# Altium PCB AD Sensor Module.PcbDoc
Units mil, origin at the board's own origin, x right, y up, seen from the top; angles counter-clockwise.
Board outline 3000 x 1100 mil, 4 copper layers (Top Layer, Ground Plane, Power Plane, Bottom Layer), stack 30.634 mil thick; 79 components, 66 nets, 287 pads, 94 vias.
Unrouted connection lines stored in the file: 1.
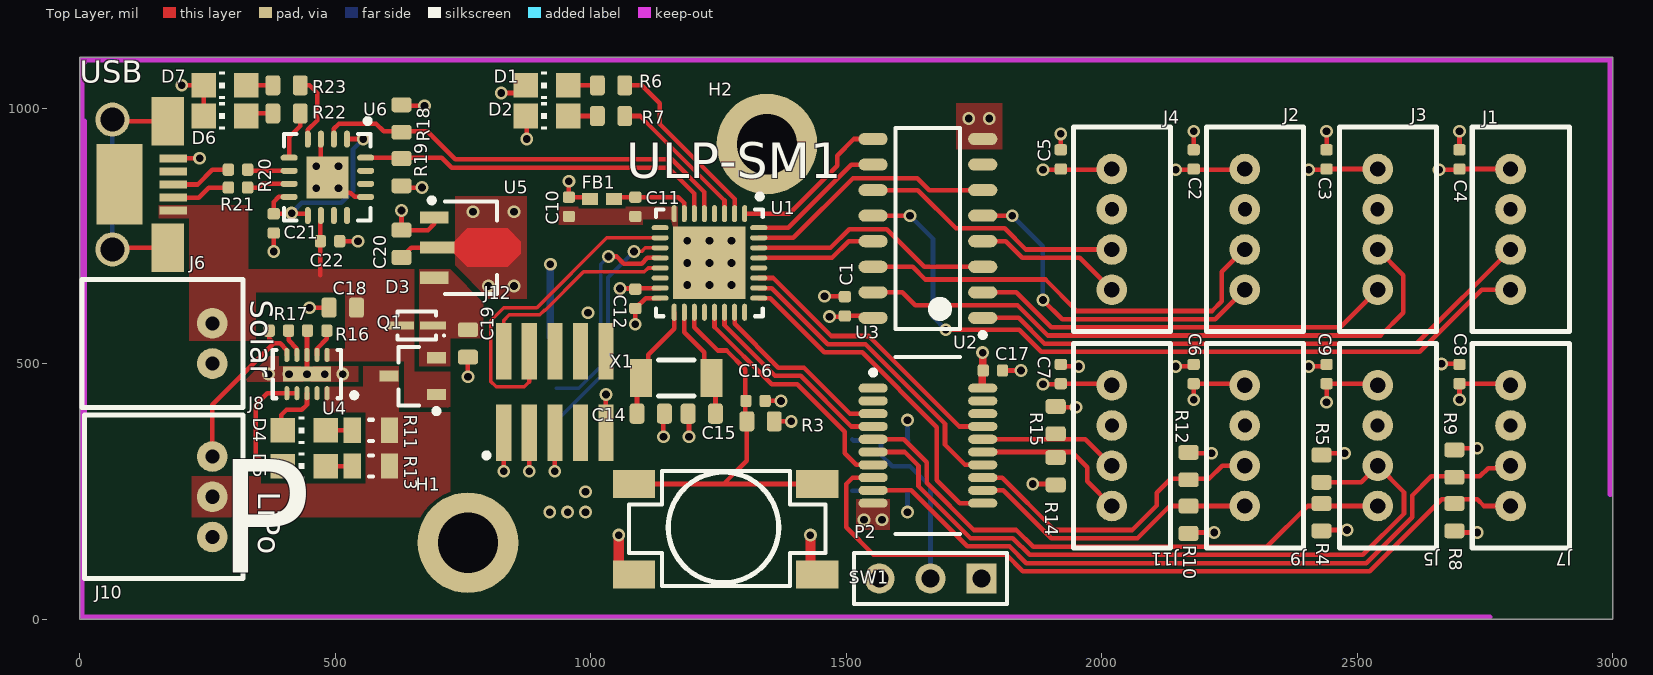
[diagram p0: Top Layer view]
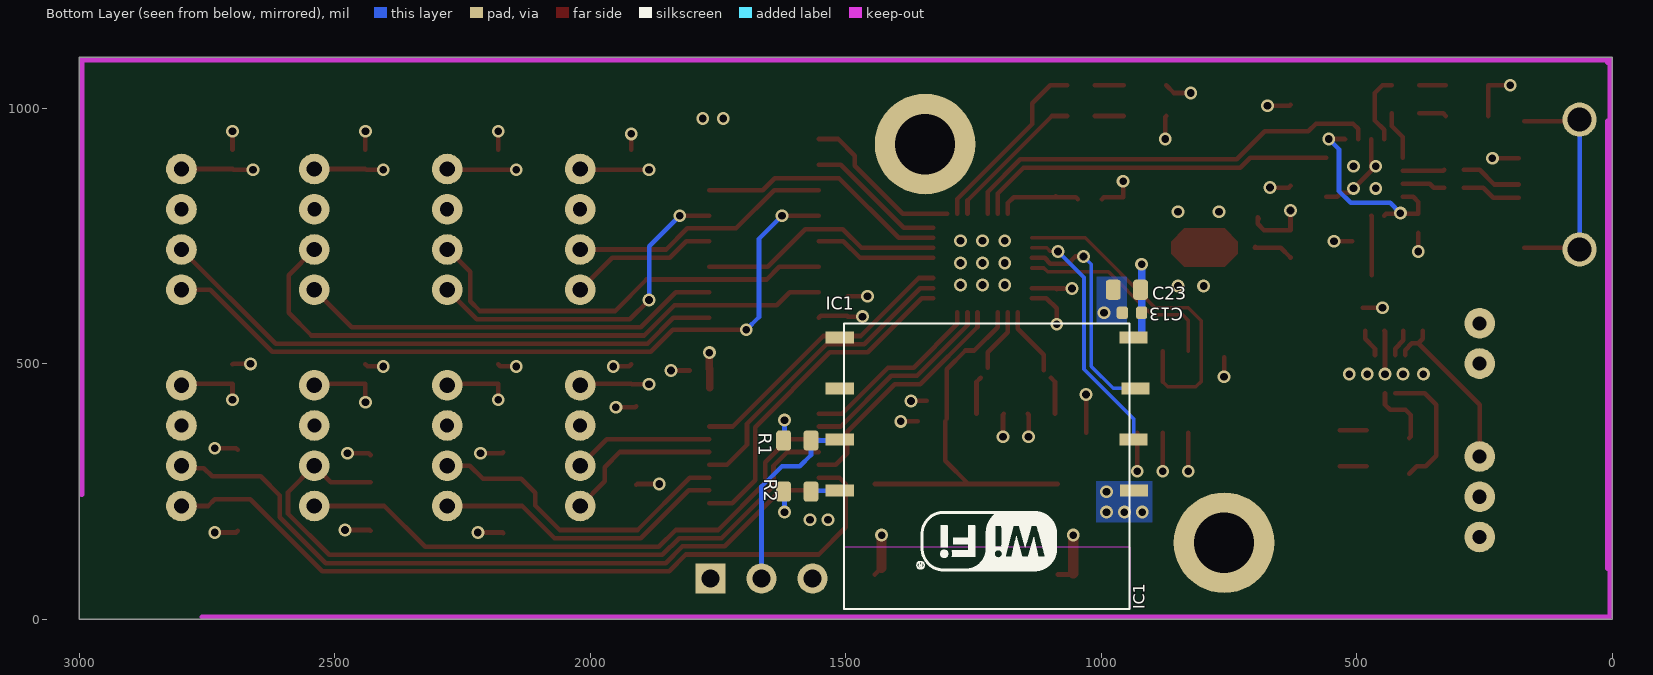
[diagram p1: Bottom Layer view, seen from below]
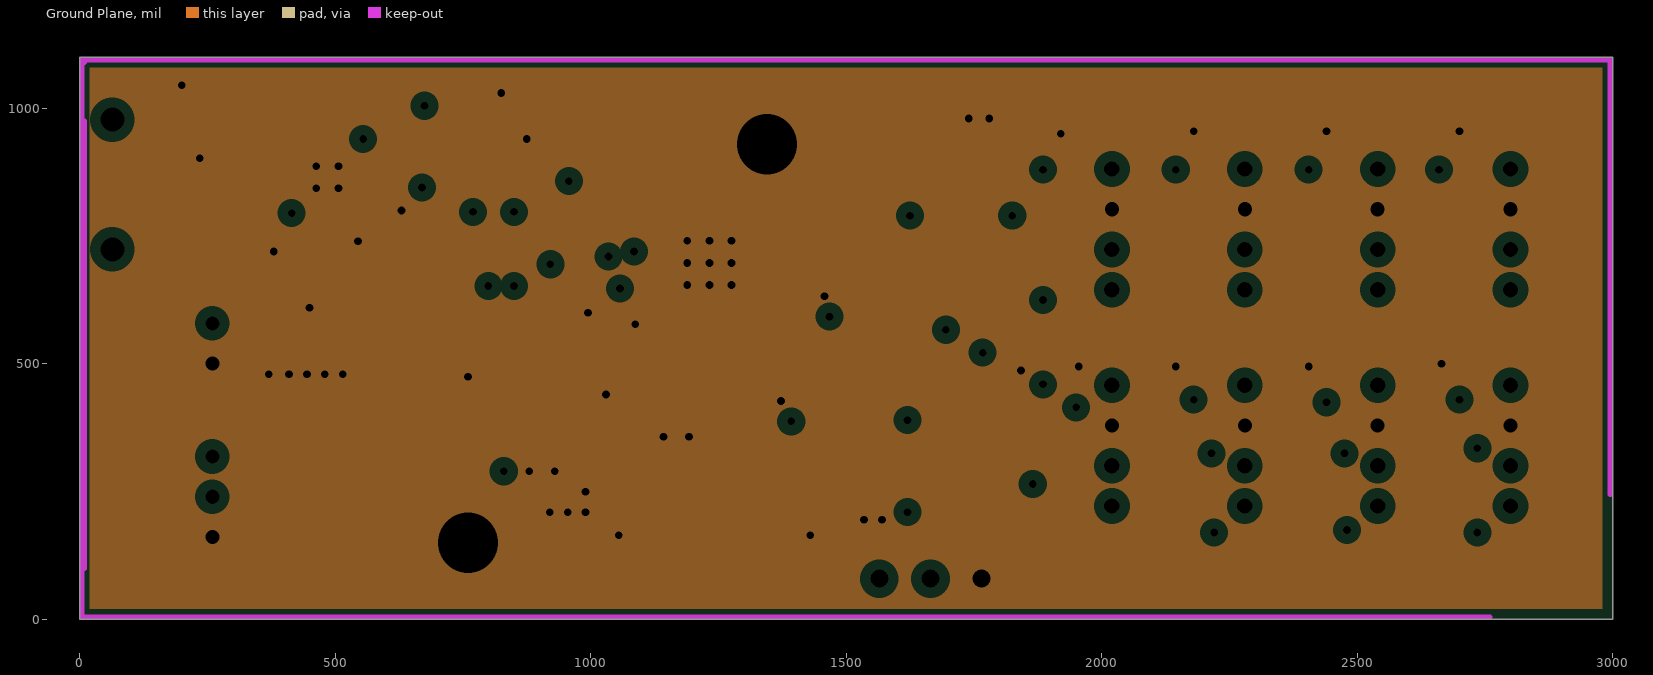
[diagram p2: Ground Plane, clearances drawn from the general rule]
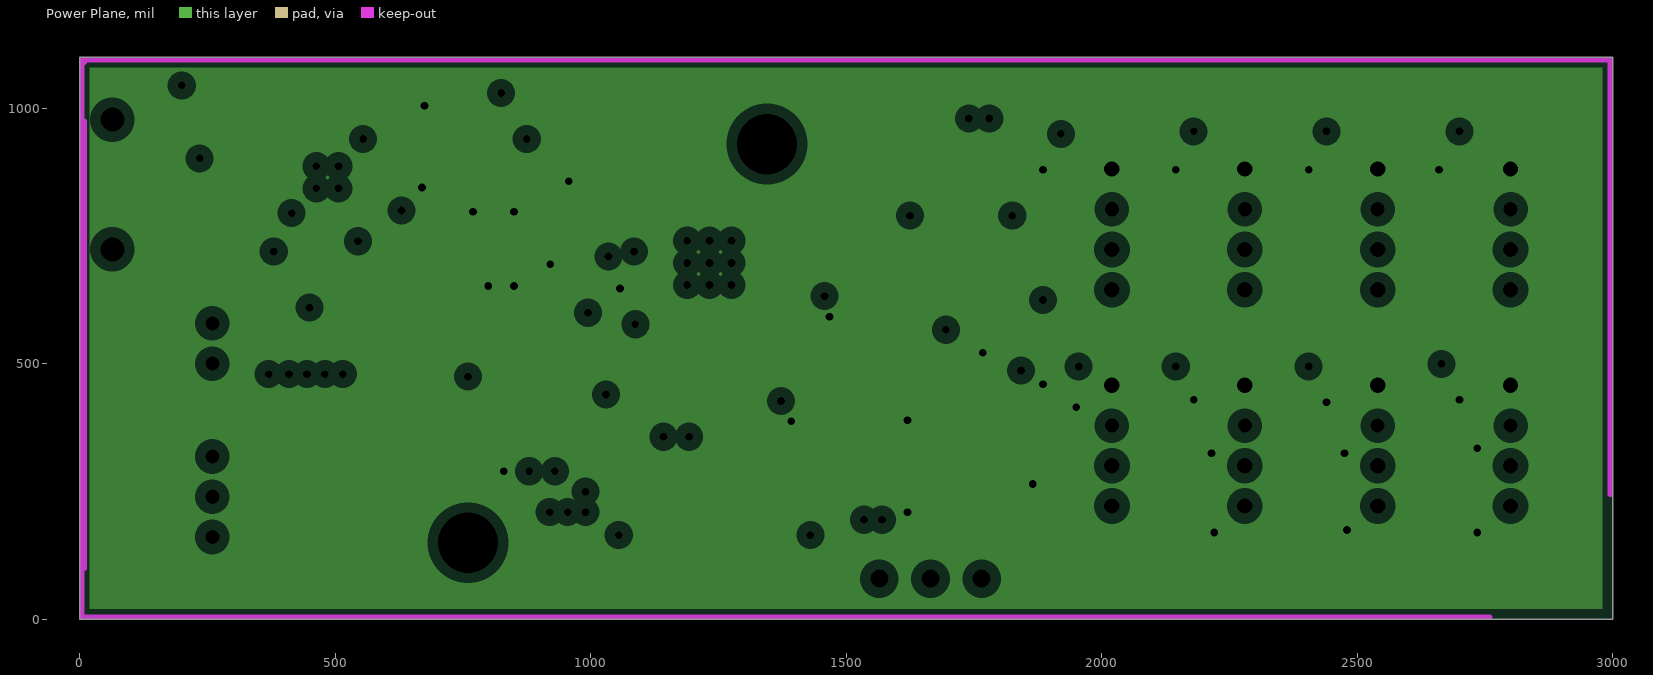
[diagram p3: Power Plane, clearances drawn from the general rule]

## Layer stack, top to bottom
Top Solder: solder mask 0.4, Solder Resist, Dk 3.5
Top Layer: signal copper 1.4
Dielectric 1: core 10, FR-4, Dk 4.2
Ground Plane: plane copper 1.417, net GND
Dielectric 2: core 10, Dk 4.2
Power Plane: plane copper 1.417, net 3.3VCC
Dielectric 3: prepreg 5, Dk 4.2
Bottom Layer: signal copper 1.4
Bottom Solder: solder mask 0.4, Solder Resist, Dk 3.5

## Board outline
0,0 3000,0 3000,1100 0,1100

## Design rules (kind name [scope] priority, off if disabled: settings)
AcuteAngle [All] p1: minimum=6.00000000000000E+0001 checktracksonly=FALSE
Clearance [All] p1: gap=7
ComponentClearance [All] p1: gap=7 collisioncheckmode=3 verticalgap=10 showdistances=TRUE
FanoutControl Fanout_SOIC [(InComponent('U8') AND InComponent('U7'))] p3: bgadir=Out bgaviamode=Centered fanoutstyle=Staggered fanoutdirection=Alternating viagrid=1 // Fanout_SOIC (Default Rule)
FanoutControl Fanout_Small [All] p4: bgadir=Out bgaviamode=Centered fanoutstyle=Auto fanoutdirection=Alternating viagrid=1 // Fanout_Small (Default Rule)
HoleSize [All] p1: absolutevalues=TRUE maxlimit=200 minlimit=15 maxpercent=80.000 minpercent=20.000
MinimumSolderMaskSliver [All] p1 off: minsoldermaskwidth=10
PasteMaskExpansion [All] p1: expansion=-1
PlaneClearance [All] p1: clearance=20
PlaneConnect [All] p1: planeconnectstyle=Relief reliefexpansion=20 reliefentries=4 reliefconductorwidth=10 reliefairgap=10
PolygonConnect [All] p1: connectstyle=Direct reliefconductorwidth=10 reliefentries=4 polygonreliefangle="90 Angle" airgapwidth=10
RoutingVias [All] p1: holewidth=15 width=25 viastyle="Through Hole" minholewidth=15 minwidth=25 maxholewidth=28 maxwidth=50
SMDToCorner [All] p1: distance=30000
SilkToSilkClearance [All] p1 off: silktosilkclearance=10
SilkToSolderMaskClearance SilkscreenOverComponentPads [IsPad] p1 off: minsilkscreentomaskgap=10 clearancetoexposedcopper=TRUE
SolderMaskExpansion [All] p1: expansion=4
Width [All] p1: maxlimit=200 minlimit=7 preferedwidth=8 minimp=50.000000 maximp=50.000000 favimp=50.000000
20 further rules are at their usual default settings.

## Components (designator, comment, footprint, x,y, rotation, side; value= is the part's Value field where it differs from the comment)
C1 "100nF" C0402 1497.5,612.5 r90 top
C2 "100nF" C0402 2180,900 r90 top
C3 "100nF" C0402 2440,900 r90 top
C4 "100nF" C0402 2700,900 r90 top
C5 "100nF" C0402 1920,900 r90 top
C6 "100nF" C0402 2180,480 r90 top
C7 "100nF" C0402 1920,480 r90 top
C8 "100nF" C0402 2700,480 r90 top
C9 "100nF" C0402 2440,480 r90 top
C10 "100nF" C0402 957.5,807.5 r270 top
C11 "100nF" C0402 1087.5,807.5 r270 top
C12 "100nF" C0402 1087.5,627.5 r270 top
C13 "100nF" C0402 940,600 r0 bottom
C14 "0603" C0603 1117.5,402.5 r180 top
C15 "0603" C0603 1217.5,402.5 r0 top
C16 "100nF" C0402 1322.5,427.5 r0 top
C17 "100nF" C0402 1787,487 r0 top
C18 "0603" C0603 515,610 r0 top
C19 "0603" C0603 760,540 r90 top
C20 "0603" C0603 630,735 r270 top
C21 "100nF" C0402 380,775 r270 top
C22 "100nF" C0402 490,740 r0 top
C23 "0603" C0603 950,645 r180 bottom
D1 "5988140107F" LED2012120 915,1045 r180 top
D2 "5988140107F" LED2012120 915,985 r180 top
D3 "BAT20JFILM" "BAT20JFILM - DIOM1712X11N" 660,575 r180 top
D4 "5988140107F" LED2012120 440,369.99 r180 top
D5 "5988140107F" LED2012120 440,299.99 r180 top
D6 "5988140107F" LED2012120 285,985 r180 top
D7 "5988140107F" LED2012120 285,1045 r180 top
FB1 "BLM15HG601SN1D" BLM18PG121SN1D 1022.5,822.5 r0 top
H1 "M3 Hole" Hole-3mm#1 755,125 r0 top
H2 "M3 Hole" Hole-3mm#2 1350,950 r0 top
IC1 "ESP8266 ESP-02" "ESP8266 ESP-02" 945,20 r90 bottom
J1 "B4B-PH-K-S LF SN" B4B-PH-K-S(LF)(SN) 2800,763.11 r270 top
J2 "B4B-PH-K-S LF SN" B4B-PH-K-S(LF)(SN) 2280,763.11 r270 top
J3 "B4B-PH-K-S LF SN" B4B-PH-K-S(LF)(SN) 2540,763.11 r270 top
J4 "B4B-PH-K-S LF SN" B4B-PH-K-S(LF)(SN) 2020,763.11 r270 top
J5 "B4B-PH-K-S LF SN" B4B-PH-K-S(LF)(SN) 2540,340 r270 top
J6 "DX4R005J91R5100" "Micro USB Circular Holes Only" 25,850 r270 top
J7 "B4B-PH-K-S LF SN" B4B-PH-K-S(LF)(SN) 2800,340 r270 top
J8 "S2B-PH-K-S(LF)(SN)" S2B-PH-K-S(LF)(SN) 260,540 r270 top
J9 "B4B-PH-K-S LF SN" B4B-PH-K-S(LF)(SN) 2280,340 r270 top
J10 "S3B-PH-K-S(LF)(SN)" S3B-PH-K-S(LF)(SN) 260,240 r270 top
J11 "B4B-PH-K-S LF SN" B4B-PH-K-S(LF)(SN) 2020,340 r270 top
J12 "FTSH-105-XX-X-DV" FTSH-105-XX-X-DV 930,445 r180 top
P2 "Header 3" HDR1X3 1765,80 r180 top
Q1 "DMG2307L-7" "DMG2307L-7 - SOT92P240X102-3N" 652,476 r180 top
R1 "1K" R0603 1595,350 r0 bottom
R2 "1K" R0603 1595,250 r0 bottom
R3 "1K" R0603 1332.5,387.5 r0 top
R4 "4.7K" R0603 2430,200 r90 top
R5 "4.7K" R0603 2430,295 r270 top
R6 "1K" R0603 1040,1045 r180 top
R7 "1K" R0603 1040,985 r180 top
R8 "4.7K" R0603 2690,200 r90 top
R9 "4.7K" R0603 2690,305 r270 top
R10 "4.7K" R0603 2170,195 r90 top
R11 "ERJ-6ENF2001V" R0805 570,369.99 r0 top
R12 "4.7K" R0603 2170,300 r270 top
R13 "ERJ-6ENF2001V" R0805 570,299.99 r0 top
R14 "4.7K" R0603 1910,290 r90 top
R15 "4.7K" R0603 1910,390 r270 top
R16 "RC1005F4870CS" R0402 465,564.99 r0 top
R17 "100K" R0402 390,564.99 r0 top
R18 "4.7K" R0603 630,980 r90 top
R19 "4.7K" R0603 630,875 r270 top
R20 "RR0510R-270-D" R0402 310,880 r0 top
R21 "RR0510R-270-D" R0402 310,845 r0 top
R22 "1K" R0603 405,990 r180 top
R23 "1K" R0603 405,1045 r0 top
SW1 "TL3301AF160QG" TL3301AF160QG 1085,265 r0 top
U1 "MKL17Z256VFM4 - 32 Pin VQFN" "MKL17Z256VFM4 - QFN50P500X500X65_HS-33N" 1232.5,697.5 r270 top
U2 "74HC4052" 74HC4052 1660,765 r180 top
U3 "PCA9518DWR" PCA9518DWR 1660,340 r0 top
U4 "BQ24210DQCT" "bq24210 - QFN50P300X200X80-10N" 445,479.99 r180 top
U5 "AZ1117CR-3.3TRG1" "AZ1117CR-3.3TRG1 - SOT89-150P410X160-3N" 765,727.5 r0 top
U6 "FT201XQ-R" "FT201XQ-R - QFN65P400X400X80_HS-17N" 485,865 r270 top
X1 "ABS07-32.768KHZ-9-T" ABS07-32.768KHZ-9-T 1167.5,472.5 r0 top

## Footprints (in the part's own frame and the unit in brackets; to place one, negate y for a bottom-side part, rotate by r counter-clockwise, add the part's x,y. Pads: shape width x height; smd on the part's side, far side on the other; paste and mask are expansions set on the pad)
74HC4052 [mm] "SOIC, 16-Leads, Body 9.90x3.90mm, Pitch 1.27mm, IPC Medium Density"
  oval 1.45x0.6 smd: 1(-2.725,4.445) 2(-2.725,3.175) 3(-2.725,1.905) 4(-2.725,0.635) 5(-2.725,-0.635) 6(-2.725,-1.905) 7(-2.725,-3.175) 8(-2.725,-4.445) 9(2.725,-4.445) 10(2.725,-3.175) 11(2.725,-1.905) 12(2.725,-0.635) 13(2.725,0.635) 14(2.725,1.905) 15(2.725,3.175) 16(2.725,4.445)
  silkscreen extent -2.85,-5 1.6,5.42, body extent -2,-5 2,5, height 1.75
ABS07-32.768KHZ-9-T [mm] "Two Pin Crystal Oscilator"
  rect 1.1x1.9 smd: 1(-1.75,0) 2(1.75,0)
  silkscreen extent -0.89,-0.89 0.89,0.89, body extent -1.6,-0.75 1.6,0.75, height 0.89
"AZ1117CR-3.3TRG1 - SOT89-150P410X160-3N" [mm] "SOT89, 3-Leads, Body 4.50x2.45mm, Pitch 1.50mm, Lead Span 4.1mm, IPC Medium Density"
  rect 1.4x0.6 smd: 1(-1.8,1.5) 3(-1.8,-1.5)
  rect 1.7x0.6 smd: 2(-1.65,0)
  Top Layer region: -0.8,0.3 -0.15,0.95 1.85,0.95 2.5,0.3 2.5,-0.3 1.85,-0.95 -0.15,-0.95 -0.8,-0.3
  silkscreen extent -2.05,-2.3 1.32,2.47, body extent -1.28,-2.3 1.32,2.3, height 1.6
B4B-PH-K-S(LF)(SN) [mil] "B4B-PH-K-S(LF)(SN)"
  round 60 hole 30: 1(-118.11,0) 3(39.37,0) 4(118.11,0)
  round 60 hole 27.56: 2(-39.37,0)
  silkscreen extent -200,-75 200,115, body extent -195,-67 195,110, height 236
"BAT20JFILM - DIOM1712X11N" [mm] "Molded Diode, 2-Leads, Body 1.66x1.23mm, IPC Medium Density"
  rect 1.3x0.4 smd: 1(-0.8,0) 2(0.8,0)
  silkscreen extent -1.4,-0.7 0.95,0.7, body extent -0.9,-0.67 0.9,0.67, height 1.13
BLM18PG121SN1D [mm] "Chip Inductor, 2-Leads, Body 1.0x0.5mm, IPC Medium Density"
  rect 0.8x0.6 smd: 1(-0.6,0) 2(0.6,0)
  body extent -0.52,-0.28 0.53,0.27, height 0.6
"bq24210 - QFN50P300X200X80-10N" [mm] "QFN, 10-Leads, Body 3.00x2.00mm, Pitch 0.50mm, IPC Medium Density"
  oval 0.25x0.7 smd: 1(-1,-0.95) 2(-0.5,-0.95) 3(0,-0.95) 4(0.5,-0.95) 5(1,-0.95) 6(1,0.95) 7(0.5,0.95) 8(0,0.95) 9(-0.5,0.95) 10(-1,0.95)
  rect 2.4x0.75 smd: 11(0,0)
  silkscreen extent -2.48,-1.2 1.7,1.2, body extent -1.55,-1.05 1.55,1.05, height 0.8
C0402 [mil]
  rrect40% 22x24 smd: 1(-18.7,0) 2(19,0)
  body extent -20,-10 20,10, height 20
C0603 [mm]
  rrect40% 0.74x1 smd: 1(-0.68,0) 2(0.68,0)
  body extent -0.8,-0.4 0.8,0.4, height 0.8
"DMG2307L-7 - SOT92P240X102-3N" [mm] "SOT23, 3-Leads, Body 2.85x2.40mm, Pitch 0.92mm, IPC Medium Density"
  rect 0.95x0.55 smd: 1(-1.175,0.915) 2(-1.175,-0.915) 3(1.175,0)
  silkscreen extent -1.3,-1.45 0.7,1.86, body extent -0.7,-1.45 0.7,1.45, height 1.03
"ESP8266 ESP-02" [mil] "ESP8266 ESP-02"
  rect 23.62x55.12 smd: 1(232,-9) 2(332,-8) 3(432,-12) 4(532,-8) 5(532,567) 6(432,567) 7(332,567) 8(232,567)
  Top Layer keep-out region: 0,559.06 1.06,558 122,558 122,1 121,0 0,0
  silkscreen extent 0,0 559,559, body extent 0,0 559,559, height 39
"FT201XQ-R - QFN65P400X400X80_HS-17N" [mm] "QFN, 16-Leads, Body 4.00x4.00mm, Pitch 0.65mm, Thermal Pad 2.08x2.08mm, IPC Medium Density"
  oval 0.85x0.3 smd: 1(-1.9,0.975) 2(-1.9,0.325) 3(-1.9,-0.325) 4(-1.9,-0.975) 9(1.9,-0.975) 10(1.9,-0.325) 11(1.9,0.325) 12(1.9,0.975)
  oval 0.3x0.85 smd: 5(-0.975,-1.9) 6(-0.325,-1.9) 7(0.325,-1.9) 8(0.975,-1.9) 13(0.975,1.9) 14(0.325,1.9) 15(-0.325,1.9) 16(-0.975,1.9)
  rect 2.08x2.08 smd: 17(0,0)
  silkscreen extent -2.92,-2.15 2.15,2.15, body extent -2,-2 2,2, height 0.8
FTSH-105-XX-X-DV [mm] "1.27mm pitch, 10 pin, terminal strip; vertical, SMT"
  rect 0.75x2.8 smd mask+0: 1(2.54,2.03) 2(2.54,-2.03) 3(1.27,2.03) 4(1.27,-2.03) 5(0,2.03) 6(0,-2.03) 7(-1.27,2.03) 8(-1.27,-2.03) 9(-2.54,2.03) 10(-2.54,-2.03)
  silkscreen extent 3.27,3.03 3.52,3.27
HDR1X3 [mm] "Connector; Header; 3 Position"
  rect 1.5x1.5 hole 0.9: 1(0,0)
  round 1.5 hole 0.9: 2(2.54,0) 3(5.08,0)
  silkscreen extent -1.27,-1.27 6.35,1.27
Hole-3mm#1 [mm]
  round 5 hole 3: 1(0.127,0.635)
Hole-3mm#2 [mm]
  round 5 hole 3: 1(-0.127,-0.508)
LED2012120 [mil]
  rect 48x48 smd: A(-41.34,0) C(42,0)
  silkscreen extent 0,-27 12,27, body extent -50,-25 50,25, height 28
"Micro USB Circular Holes Only" [mm]
  rect 0.4x1.35 smd: 1(1.275,4.025) 2(0.625,4.025) 3(-0.025,4.025) 4(-0.675,4.025) 5(-1.325,4.025)
  rect 2.4x1.6 smd: 6(3.125,3.75) 9(-3.175,3.75)
  round 1.7 hole 1.2: 7(3.2,1) 8(-3.25,1)
  rect 4x2.3 smd: GND(-0.025,1.35)
"MKL17Z256VFM4 - QFN50P500X500X65_HS-33N" [mm] "QFN, 32-Leads, Body 5.00x5.00mm, Pitch 0.50mm, Thermal Pad 3.60x3.60mm, IPC Medium Density"
  oval 0.85x0.25 smd: 1(-2.45,1.75) 2(-2.45,1.25) 3(-2.45,0.75) 4(-2.45,0.25) 5(-2.45,-0.25) 6(-2.45,-0.75) 7(-2.45,-1.25) 8(-2.45,-1.75) 17(2.45,-1.75) 18(2.45,-1.25) 19(2.45,-0.75) 20(2.45,-0.25) 21(2.45,0.25) 22(2.45,0.75) 23(2.45,1.25) 24(2.45,1.75)
  oval 0.25x0.85 smd: 9(-1.75,-2.45) 10(-1.25,-2.45) 11(-0.75,-2.45) 12(-0.25,-2.45) 13(0.25,-2.45) 14(0.75,-2.45) 15(1.25,-2.45) 16(1.75,-2.45) 25(1.75,2.45) 26(1.25,2.45) 27(0.75,2.45) 28(0.25,2.45) 29(-0.25,2.45) 30(-0.75,2.45) 31(-1.25,2.45) 32(-1.75,2.45)
  rect 3.6x3.6 smd: 33(0,0)
  silkscreen extent -3.42,-2.65 2.65,2.65, body extent -2.5,-2.5 2.5,2.5, height 0.65
PCA9518DWR [mm] "SOP, 20-Leads, Body 8.65x3.90mm, Pitch 0.64mm, Thermal Pad 5.22x3.10mm, IPC Medium Density"
  oval 1.45x0.45 smd: 1(-2.725,2.857) 2(-2.725,2.222) 3(-2.725,1.587) 4(-2.725,0.953) 5(-2.725,0.318) 6(-2.725,-0.318) 7(-2.725,-0.953) 8(-2.725,-1.587) 9(-2.725,-2.222) 10(-2.725,-2.857) 11(2.725,-2.857) 12(2.725,-2.222) 13(2.725,-1.587) 14(2.725,-0.953) 15(2.725,-0.318) 16(2.725,0.318) 17(2.725,0.953) 18(2.725,1.587) 19(2.725,2.222) 20(2.725,2.857)
  silkscreen extent -2.85,-4.4 1.6,4.4, body extent -2,-4.4 2,4.4, height 1.75
R0402 [mil]
  rrect40% 22x24 smd: 1(-18.9,0) 2(19,0)
  body extent -20,-10 20,10, height 14
R0603 [mm]
  rrect40% 0.74x1 smd: 1(-0.68,0) 2(0.68,0)
  body extent -0.8,-0.4 0.8,0.4, height 0.8
R0805 [mm]
  rect 0.85x1.25 smd: 1(-0.925,0) 2(0.925,0)
  silkscreen extent -0.1,-0.53 0.1,0.53, body extent -1.1,-0.7 1.1,0.7, height 0.5
S2B-PH-K-S(LF)(SN) [mil] "S2B-PH-K-S(LF)(SN)"
  round 60 hole 27.56: 1(-39.37,0) 2(39.37,0)
  silkscreen extent -125,-255 125,60, body extent -116,-246 116,53, height 189
S3B-PH-K-S(LF)(SN) [mil] "3 Pin right angle 2mm pitch shrouded male pin connector"
  round 60 hole 27.56: 1(-78.74,0) 2(0,0) 3(78.74,0)
  silkscreen extent -160,-250 160,60, body extent -156,-245 156,54, height 189
TL3301AF160QG [mm] "TL3301AF160QG Tactile Switch"
  rect 2.1x1.4 smd: 1(0,0) 1(9.1,0) 2(0,-4.5) 2(9.1,-4.5)
  silkscreen extent -0.25,-5.08 9.53,0.64, body extent -0.43,-5.26 9.57,0.74, height 5.11

## Part data
C1 C2 C3 C4 C5 C6 C7 C8 C9 C10 C11 C12 C13 C16 C17 C21 C22: library part GRM155R71C104KA88D, "CAP CER 0402 100nF 16V 10% X7R"
C14 C15: library part CL10C090CB8NNNC, "CAP CER 9PF 50V NP0 0603"
C18 C19: library part CL05A105KA5NQNC, "CAP CER 1UF 25V X5R 0402"
C20: library part CL10A106KQ8NNNC, "CAP CER 10UF 6.3V X5R 0603"
C23: library part CL10B104KB8SFNC, "CAP CER 0.1UF 50V 10% X7R 0603"
D1 D2 D4 D5 D6 D7: "LED 0805 Yellow"
D3: "DIODE SCHOTTKY 23V 1A SOD323"
H1 H2: library part Hole, "3mm Hole"
J1 J2 J3 J4 J5 J7 J9 J11: "CONN HEADER PH TOP 4POS 2MM"
J6: library part "Micro USB", "Micro USB Jack B"
J8 J10: "CONN HEADER PH SIDE 2POS 2MM"
J12: "FTSH-105-XX-X-DV ARM COrtex JTAG"
P2: "Header, 3-Pin"
Q1: "MOSFET P-CH 30V 2.5A SOT-23"
R1 R2 R3 R6 R7 R22 R23: library part ERJ-3EKF1001V, "RES 0603 1K 100mW 1%"
R4 R5 R8 R9 R10 R12 R14 R15 R18 R19: library part ERJ3EKF4701V, "RES 0603 4.7K 100mW 1%"
R11 R13: "RES SMD 2K OHM 1% 1/8W 0805"
R16: "RES SMD 487 OHM 1% 1/16W 0402"
R17: library part "Standin 0402", "Standin 0402"
R20 R21: "RES SMD 27 OHM 0.5% 1/16W 0402"
U1: "ARM Cortex M0+ Microcontroller for Low Power Applications, MKL1x Series"
U2: "Dual 4-channel analog multiplexer/demultiplexer"
U3: "IC EXPANDABLE 5CH I2C HUB 20SOIC"
U4: "IC BATT CHARGER LI-ION 10WSON (VBUS and Solar Voltaic Cell)"
U5: "IC REG LDO 3.3V 0.8A SOT89"
U6: "IC USB FS I2C 16QFN"
X1: "32.768kHz ±20ppm Crystal 9pF 70 kOhm -40°C ~ 85°C Surface Mount 2-SMD"

## Via types
v1: diameter 25, hole 15, Top Layer to Bottom Layer, 94 vias

## Nets (pads, with @x,y where several pads share a name; then routed paths per layer and width w, separated by ;. In a path a pad name is that pad's centre, name@x,y a point inside that pad or via, vN(x,y) a via of type N, cw(c..) or ccw(c..) an arc to the next point about the centre after c; other vN are vias at no path point)
3.3VCC: C1.1 C2.1 C3.1 C4.1 C5.1 C6.1 C7.1 C8.1 C9.1 C10.1 C12.1 C13.1 C17.1 C20.2 C23.2 FB1.1 IC1.4 J1.1 J2.1 J3.1 J4.1 J5.1 J7.1 J9.1 J11.1 J12.1 R1.2 R2.2 R3.2 R4.1 R5.1 R8.1 R9.1 R10.1 R12.1 R14.1 R15.1 R18.2 R19.2 U1.15 U2.16 U3.20 U5.2 | length 2286.6
  Top Layer w9: C20.2 649.27,727.5 U5.2 U5.2@698.74,728.8 ; R19.2 633.23,845 v1(670,845) ; R18.2 631.77,1005 v1(675,1005) ; v1(830,290) J12.1 ; v1(957.5,857.5) C10.1 995.18,826.2 FB1.1 ; v1(1057.5,647.5) 1086.2,647.5 C12.1 1089.59,648.29 U1.15 ; R3.2 v1(1392.5,387.5) ; v1(1467.5,592.5) 1496.2,592.5 C1.1 1548.92,593.8 U2.16 ; U3.20@1766.3,453.48 U3.20 ; C17.1@1766.3,490 C17.1@1767,490.7 ; v1(1865,265) 1908.23,265 R14.1 ; v1(1885,460) 1918.7,460 C7.1 2016.81,461.3 J11.1 ; v1(1885,880) 2018.78,880 J4.1 ; R15.1 1911.77,415 v1(1950,415) ; v1(2145,880) 2278.78,880 J2.1 ; R10.1 2171.77,170 v1(2220,170) ; R12.1 2171.77,325 v1(2215,325) ; v1(2180,430) C6.1 2276.81,461.3 J9.1 ; v1(2405,880) 2438.7,880 C3.1 2539.92,881.3 J3.1 ; R4.1 2431.77,175 v1(2480,175) ; R5.1 2433.23,325 v1(2475,325) ; v1(2440,425) C9.1 2536.81,461.3 J5.1 ; v1(2660,880) 2698.7,880 C4.1 2799.92,881.3 J1.1 ; R8.1 2693.23,170 v1(2735,170) ; R9.1 2693.23,335 v1(2735,335) ; v1(2700,430) C8.1 2796.81,461.3 J7.1
  Top Layer w15: U3.20@1766.3,453.48 C17.1@1766.3,490 ; C17.1@1767,490.7 v1(1767,522)
  Bottom Layer w9: v1(1620,210) 1620,248.22 R2.2 ; v1(1620,390) 1620,351.77 R1.2
  Bottom Layer w15: v1(921.3,695) C13.1 921.3,552 IC1.4
  other v1: 800,652.5 850,652.5 770,797.5 850,797.5
BAT: J10.2 Q1.3 R11.2 R13.2 U4.10
EN1: U1.21 U3.7 | length 475.6
  Top Layer w9: U1.21 1242.5,600.89 1242.5,572.25 1354.25,460.5 1404.25,460.5 1497.5,367.25 1497.5,324.87 1519.87,302.5 U3.7
EN2: U1.25 U3.11 | length 665.2
  Top Layer w9: U1.25 1351.14,628.6 1457.25,522.5 1531.19,522.5 1677.5,376.19 1677.5,272.5 1722.5,227.5 U3.11
EN3: U1.26 U3.14 | length 605.8
  Top Layer w9: U1.26 1354.09,648.29 1463.87,538.5 1537.82,538.5 1693.5,382.82 1693.5,341.5 1732.5,302.5 U3.14
EN4: U1.27 U3.17 | length 558.6
  Top Layer w9: U1.27 1357.03,667.97 1470.5,554.5 1544.45,554.5 1721.45,377.5 U3.17
ESP_01_RST: IC1.7 P2.2 R1.1 | length 387.6
  Bottom Layer w9: IC1.7 1514,350 R1.1 1568.23,321.77 1590,300 1625,300 1665,260 P2.2
EXTAL0: C14.2 U1.17 X1.1 | length 208
  Top Layer w9: C14.2 1090.73,464.63 X1.1 ; X1.1@1112.5,487.5 1112.5,517.5 1163.6,568.6 U1.17
GND: C1.2 C2.2 C3.2 C4.2 C5.2 C6.2 C7.2 C8.2 C9.2 C10.2 C11.2 C12.2 C13.2 C14.1 C15.1 C16.2 C17.2 C18.1 C19.1 C20.1 C21.2 C22.2 C23.1 D1.C D2.C D6.C D7.C H1.1 H2.1 IC1.1 J1.2 J2.2 J3.2 J4.2 J5.2 J6.5 J7.2 J8.2 J9.2 J10.3 J11.2 J12.3 J12.5 J12.9 P2.1 R16.1 SW1.2 U1.8 U1.16 U1.33 U2.8 U3.10 U4.3 U4.11 U5.1 U6.3 U6.13 U6.17 | length 1767.2
  Top Layer w9: J6.5 v1(235,902.17) ; v1(200,1045) D7.C D6.C ; v1(380,720) C21.2 ; v1(445,479.99) U4.3 445,563.89 R16.1 ; v1(450,610) C18.1 ; U6.3 472.2,877.8 U6.17 515,835 530,835 538.39,826.61 U6.13 ; C22.2 v1(545,740) ; v1(630,800) C20.1 681.77,761.77 694.13,774.13 U5.1 U5.1@691.85,784.27 ; v1(760,475) C19.1 ; v1(825,1030) 858,1030 D1.C ; D2.C 875,983 v1(875,940) ; v1(880,290) J12.3 ; v1(930,290) J12.5 ; J12.9 v1(1030,440) ; SW1.2@1055,90 1057.17,87.83 SW1.2@1085,87.83 ; v1(1087.5,577.5) C12.2 1107.6,628.6 U1.16 ; v1(1142.5,357.5) 1142.5,400.73 C14.1 ; C15.1 1192.5,400.73 v1(1192.5,357.5) ; C16.2 v1(1372.5,427.5) ; SW1.2@1430,101.1 SW1.2@1443.27,87.83 ; v1(1457.5,632.5) 1496.5,632.5 C1.2 ; C17.2 v1(1842,487) ; C7.2 1924,495 v1(1955,495) ; C5.2 v1(1920,950) ; v1(2145,495) 2176,495 C6.2 ; C2.2 v1(2180,955) ; v1(2405,495) 2436,495 C9.2 ; C3.2 v1(2440,955) ; v1(2665,500) 2699,500 C8.2 ; C4.2 v1(2700,955)
  Top Layer w20: SW1.2@1055,90 v1(1055,165) ; SW1.2@1430,101.1 v1(1430,165)
  other v1: 1535,195 1570,195 920,210 955,210 990,210 990,250 370,480 410,480 480,480 515,480 995,600 1189.19,654.19 1232.5,654.19 1275.81,654.19 1189.19,697.5 1232.5,697.5 1275.81,697.5 1189.19,740.81 1232.5,740.81 1275.81,740.81 463.35,843.35 506.65,843.35 463.35,886.65 506.65,886.65 1740,980 1780,980
I2C0_SCL: R19.1 U1.6 U6.16 | length 711.6
  Top Layer w9: U6.16 708.99,903.39 728.37,884 1152.37,884 1202.97,833.4 U1.6
I2C0_SDA: R18.1 U1.5 U6.2 | length 847
  Top Layer w9: U6.2 497.8,960.02 507.77,970 580,970 595,955 680,955 735,900 1159,900 1222.66,836.34 U1.5
I2C_SCL: U1.22 U3.4 | length 398.3
  Top Layer w9: U1.22 1262.03,575.35 1360.87,476.5 1410.87,476.5 1509.87,377.5 U3.4
I2C_SDA: U1.23 U3.3 | length 366.6
  Top Layer w9: U1.23 1281.71,578.29 1367.5,492.5 1417.5,492.5 1507.5,402.5 U3.3
K_CH_PD: IC1.8 R2.1 | length 57.1
  Bottom Layer w9: IC1.8 1566.23,252 R2.1
K_ESP_RST: P2.3
LED0: R6.1 U1.2 | length 359.5
  Top Layer w9: R6.1 1100,1045 1135,1010 1135,969.25 1281.71,822.54 U1.2
LED1: R7.1 U1.3 | length 289.4
  Top Layer w9: R7.1 1096.63,985 1262.03,819.6 U1.3
NetC11_1: C11.1 FB1.2 U1.7 | length 167.2
  Top Layer w9: FB1.2 1049.82,826.2 C11.1 ; C11.1@1089.59,828.29 C11.1 ; U1.7 1183.29,814.71 1171.8,826.2 C11.1
NetC18_2: C18.2 C22.1 D3.2 J6.1 J8.1 Q1.1 U4.1 U6.10 | length 116.9
  Top Layer w9: 471.3,673.7 C22.1 471.3,789.29 U6.10
NetC19_2: C19.2 D3.1 Q1.2 U5.3
NetC21_1: C21.1 U6.1 U6.8 U6.9 | length 405.3
  Top Layer w9: U6.8 389.98,826.61 380,816.64 C21.1 443.11,793.7 U6.9 ; U6.1 523.58,940 v1(555,940)
  Bottom Layer w9: v1(415,795) 435,815 512.25,815 535,837.75 535,920 v1(555,940)
NetD1_A: D1.A R6.2 | length 56.9
  Top Layer w9: D1.A R6.2
NetD2_A: D2.A R7.2 | length 56.9
  Top Layer w9: D2.A R7.2
NetD4_A: D4.A R11.1 | length 52.2
  Top Layer w9: D4.A R11.1
NetD4_C: D4.C U4.8 | length 127.1
  Top Layer w9: D4.C@398,354.99 395,357.99 395,399.99 405,409.99 435,409.99 445,419.99 U4.8
NetD5_A: D5.A R13.1 | length 52.2
  Top Layer w9: D5.A R13.1
NetD5_C: D5.C U4.6 U4.7 | length 257.2
  Top Layer w9: D5.C@398,284.99 383,299.99 365,299.99 345,319.99 345,419.99 367.6,442.59 U4.6 U4.7
NetD6_A: D6.A R22.2 | length 54
  Top Layer w9: D6.A 331.33,990 R22.2
NetD7_A: D7.A R23.1 | length 51.9
  Top Layer w9: D7.A R23.1
NetJ5_3: J5.3 R5.2 U3.6 | length 1417.6
  Top Layer w9: U3.6 1614.87,327.5 1641.5,300.87 1641.5,260.87 1743.37,159 1826.25,159 1859.09,126.16 2510.91,126.16 2591.5,206.76 2591.5,249.13 J5.3 2507.6,268.23 R5.2
NetJ5_4: J5.4 R4.2 U3.5 | length 1130.9
  Top Layer w9: U3.5 1612.5,352.5 1657.5,307.5 1657.5,267.5 1750,175 1832.88,175 1865.72,142.16 2323.16,142.16 2402.89,221.89 J5.4
NetJ6_2: J6.2 R21.1 | length 115.8
  Top Layer w9: J6.2 233.44,825.39 253.05,845 R21.1
NetJ6_3: J6.3 R20.1 | length 119.7
  Top Layer w9: J6.3 230.98,850.98 260,880 R20.1
NetJ7_3: J7.3 R9.2 U3.9 | length 1412.6
  Top Layer w9: U3.9 1627.25,252.5 1736.75,143 1819.63,143 1852.46,110.16 2517.54,110.16 2607.5,200.13 2607.5,242.5 2645,280 2740,280 2756.13,296.13 2800,296.13 J7.3
NetJ7_4: J7.4 R8.2 U3.8 | length 1542.2
  Top Layer w9: U3.8 1512.5,277.5 1500,265 1500,180 1553,127 1813,127 1845.84,94.16 2524.16,94.16 2665,235 2735,235 2748.11,221.89 J7.4
NetJ9_3: J9.3 R12.2 U3.13 | length 621.6
  Top Layer w9: U3.13 1805.13,277.5 1907.63,175 2060,175 2107.98,222.98 2107.98,247.5 2135.48,275 2210,275 2235.63,300.63 J9.3
NetJ9_4: J9.4 R10.2 U3.12 | length 577.5
  Top Layer w9: U3.12 1807.5,252.5 1901,159 2070,159 2132.89,221.89 J9.4
NetJ11_3: J11.3 R15.2 U3.16 | length 274.2
  Top Layer w9: U3.16 1968.13,352.5 J11.3
NetJ11_4: J11.4 R14.2 U3.15 | length 312.9
  Top Layer w9: U3.15 1942.5,327.5 1971.89,298.11 1971.89,270 J11.4
NetR16_2: R16.2 U4.2 | length 55.6
  Top Layer w9: U4.2 464.68,529.79 484,549.11 R16.2
NetR17_2: R17.2 U4.4 | length 54.4
  Top Layer w9: R17.2 409,546.11 425.31,529.79 U4.4
NetR20_2: R20.2 U6.6 | length 82.1
  Top Layer w9: R20.2 331.2,877.8 U6.6
NetR21_2: R21.2 U6.7 | length 84.2
  Top Layer w9: R21.2 350,845 357.2,852.2 U6.7
NetR22_1: R22.1 U6.5 | length 95.5
  Top Layer w9: U6.5 410.2,943.95 431.77,965.52 R22.1
NetR23_2: R23.2 U6.4 | length 137.3
  Top Layer w9: R23.2 450,1045 465,1030 465,976.13 446.61,957.74 U6.4
RESET: C16.1 J12.10 R3.1 SW1.1 U1.19 | length 759.5
  Top Layer w9: SW1.1@1085,265 SW1.1@1443.27,265 ; U1.19 1202.97,572.03 1248.81,526.19 1265.93,526.19 1302.5,489.62 R3.1@1302.5,392.5 ; 1260,265 1305.73,310.73 R3.1
SW_EN: U1.31 U2.6 | length 496.3
  Top Layer w9: U1.31 1396.71,746.71 1513.31,863.31 1639.32,863.31 1662.63,840 U2.6
SW_S0: U1.32 U2.10 | length 275
  Top Layer w9: U1.32 1386.4,766.4 1510,890 U2.10
SW_S1: U1.1 U2.9 | length 323.5
  Top Layer w9: U1.1 1388.96,793.96 1482.5,887.5 1482.5,907.5 1515,940 U2.9
TCK/SWDCLK: J12.4 U1.10 | length 661.1
  Top Layer w7: 880,465 870,455 815.19,455 804.74,465.45 804.74,584.39 830.35,610 895,610 1031.71,746.71 U1.10
  Top Layer w9: 880,465 J12.4
THERM: J10.1 R17.1 U4.5 | length 340.2
  Top Layer w9: J10.1 260,419.99 380,539.99 ; R17.1 371.1,548.89 380,539.99 ; U4.5 405.63,526.85 392.49,539.99 380,539.99
TMS/SWDIO: J12.2 U1.13 | length 408.6
  Top Layer w7: J12.2 830,585 841,596 900.8,596 909.8,605 911.21,605 986.21,680 1105,680 1112.66,687.66 U1.13
UART0_RX: IC1.2 U1.11 | length 483.3
  Top Layer w7: v1(1085,720) 1100,720 1107.03,727.03 U1.11
  Bottom Layer w7: IC1.2 937,392.2 982.8,438 1034,489.2 1034,669 v1(1085,720)
UART0_TX: IC1.3 U1.12 | length 438.2
  Top Layer w9: v1(1035,710) 1051.06,710 1065.06,696 1099.79,696 1111.13,707.34 U1.12 U1.12@1135.62,707.76
  Bottom Layer w7: IC1.3 977,452 1020,495 1020,695 v1(1035,710)
UART2_RX: U1.29 U2.13 | length 237.3
  Top Layer w9: U1.29 1472.34,707.34 1505,740 U2.13
UART2_TX: U1.30 U2.3 | length 483.7
  Top Layer w9: U1.30 1469.4,727.03 1505.68,763.31 1579.32,763.31 1652.63,690 U2.3
UART_RX_S1: J1.4 U2.12 | length 1497.8
  Top Layer w9: U2.12 v1(1625,790) ; v1(1695,566.69) 1838.31,566.69 1881.5,523.5 2622.39,523.5 2743.89,645 J1.4
  Bottom Layer w9: v1(1625,790) 1670,745 1670,591.69 v1(1695,566.69)
UART_RX_S2: J2.4 U2.5 | length 681.9
  Top Layer w9: U2.5 v1(1825,790) ; v1(1885,625) 1922.5,587.5 2222.5,587.5 J2.4
  Bottom Layer w9: v1(1825,790) 1885,730 v1(1885,625)
UART_RX_S3: J3.4 U2.2 | length 831.5
  Top Layer w9: U2.2 1832.88,640 1901.38,571.5 2466.5,571.5 J3.4
UART_RX_S4: J4.4 U2.4 | length 292.1
  Top Layer w9: U2.4 1812.37,740 1844.63,707.74 1957.26,707.74 J4.4
UART_TX_S1: J1.3 U2.1 | length 1129.9
  Top Layer w9: U2.1 1837.63,590 1888.13,539.5 2615.76,539.5 J1.3
UART_TX_S2: J2.3 U2.14 | length 867
  Top Layer w9: U2.14 1630,690 1655,665 1890,665 1951.5,603.5 2215.87,603.5 2235,622.63 2235,680 2280,725 J2.3@2280,705
UART_TX_S3: J3.3 U2.15 | length 1235.2
  Top Layer w9: U2.15 1610,640 1635,615 1835.25,615 1894.75,555.5 2545.5,555.5 2590,600 2590,673.74 J3.3
UART_TX_S4: J4.3 U2.11 | length 515.4
  Top Layer w9: U2.11 1640,840 1715,765 1810,765 1851.26,723.74 J4.3
USB_HOUSING: J6.6 J6.7 J6.8 J6.9 | length 472.9
  Top Layer w9: J6.7 67.32,726.97 J6.6 ; J6.8 67.32,975 J6.9
  Bottom Layer w9: J6.7 J6.8
XTAL0: C15.2 U1.18 X1.2 | length 198
  Top Layer w9: U1.18 1183.29,561.71 1222.5,522.5 X1.2@1222.5,492.5 ; X1.2 1244.27,464.63 C15.2
pads on no net: IC1.5 IC1.6 J6.4 J6.GND J12.6 J12.7 J12.8 U1.4 U1.9 U1.14 U1.20 U1.24 U1.28 U2.7 U3.1 U3.2 U3.18 U3.19 U4.9 U6.11 U6.12 U6.14 U6.15

## Polygon pours and split planes (outlines as drawn)
GND on Top Layer "Top Layer-No Net" (solid, pour order 14): 545,495 390,495 390,515 365,515 355,515 315,475 315,465 545,465
NetC18_2 on Top Layer "Top Layer-No Net" (solid, pour order 10): 480,505 640,505 655,520 655,685 330,685 330,810 155,810 155,785 215,785 215,545 345,545 345,640 520,640 520,545 520,530 480,530
BAT on Top Layer "Top Layer-No Net" (solid, pour order 8): 480,455 555,455 555,495 625,495 625,405 725,405 725,200 625,200 220,200 220,280 355,280 355,265 560,265 560,405 480,405
NetC18_2 on Top Layer "Top Layer-No Net" (solid, pour order 6): 655,565 655,485 725,485 725,410 720,415 635,415 635,550 595,550 595,595 655,595
NetC19_2 on Top Layer "Top Layer-No Net" (solid, pour order 4): 665,585 665,495 725,495 725,585
GND on Top Layer "Top Layer-No Net" (solid, pour order 18): 1017.5,772.5 1102.5,772.5 1102.5,782.5 1156.83,782.5 1162.83,764.5 1170.5,764.5 1170.5,807.5 1072.5,807.5 937.5,807.5 937.5,772.5
3.3VCC on Top Layer "Top Layer-No Net" (solid, pour order 22): 750,827.5 875,827.5 875,627.5 800,627.5 735,692.5 735,827.5
GND on Top Layer "Top Layer-No Net" (solid, pour order 24): 1715,1010 1715,920 1805,920 1805,1010
GND on Top Layer "Top Layer-No Net" (solid, pour order 26): 1520,230 1520,175 1585,175 1585,235 1520,235
NetC19_2 on Top Layer "Top Layer-No Net" (solid, pour order 32): 665,685 665,565 665,550 790,550 790,620 725,685
GND on Bottom Layer "Top Layer-No Net" (solid, pour order 28): 900,270 900,190 1010,190 1010,270
GND on Bottom Layer "Top Layer-No Net" (solid, pour order 30): 950,670 950,580 1010,580 1010,670
GND on Ground Plane (split plane): 2979.9,20.1 20.1,20.1 20.1,1079.9 2979.9,1079.9
3.3VCC on Power Plane (split plane): 2979.9,20.1 20.1,20.1 20.1,1079.9 2979.9,1079.9

## Keep-outs
Keep-Out Layer:
  lines w10: 10,100 10,975 ; 10,1090 5,1095 ; 2760,5 5,5 5,1095 ; 2995,245 2995,1095 5,1095

## Silkscreen, mask and mechanical layers (free items; w line width, h text height)
Top Overlay:
  text "USB" at 0,1035 h75
  text "ULP-SM1" at 1070,840 h120
  text "Solar" at 320,625 h75 r270
  text "LiPo" at 335,250 h75 r270
  text "P" at 270,20 h380
Mechanical 15:
  the board outline again, w10